# Altium PCB retroBreadboard_v2i1.PcbDoc
Units mm, origin at the board's own origin, x right, y up, seen from the top; angles counter-clockwise.
Board outline 55.88 x 96.52 mm, 4 copper layers (Top Layer, Int1 (GND), Int2 (PWR), Bottom Layer), stack 1.369 mm thick; 81 components, 76 nets, 317 pads, 92 vias.
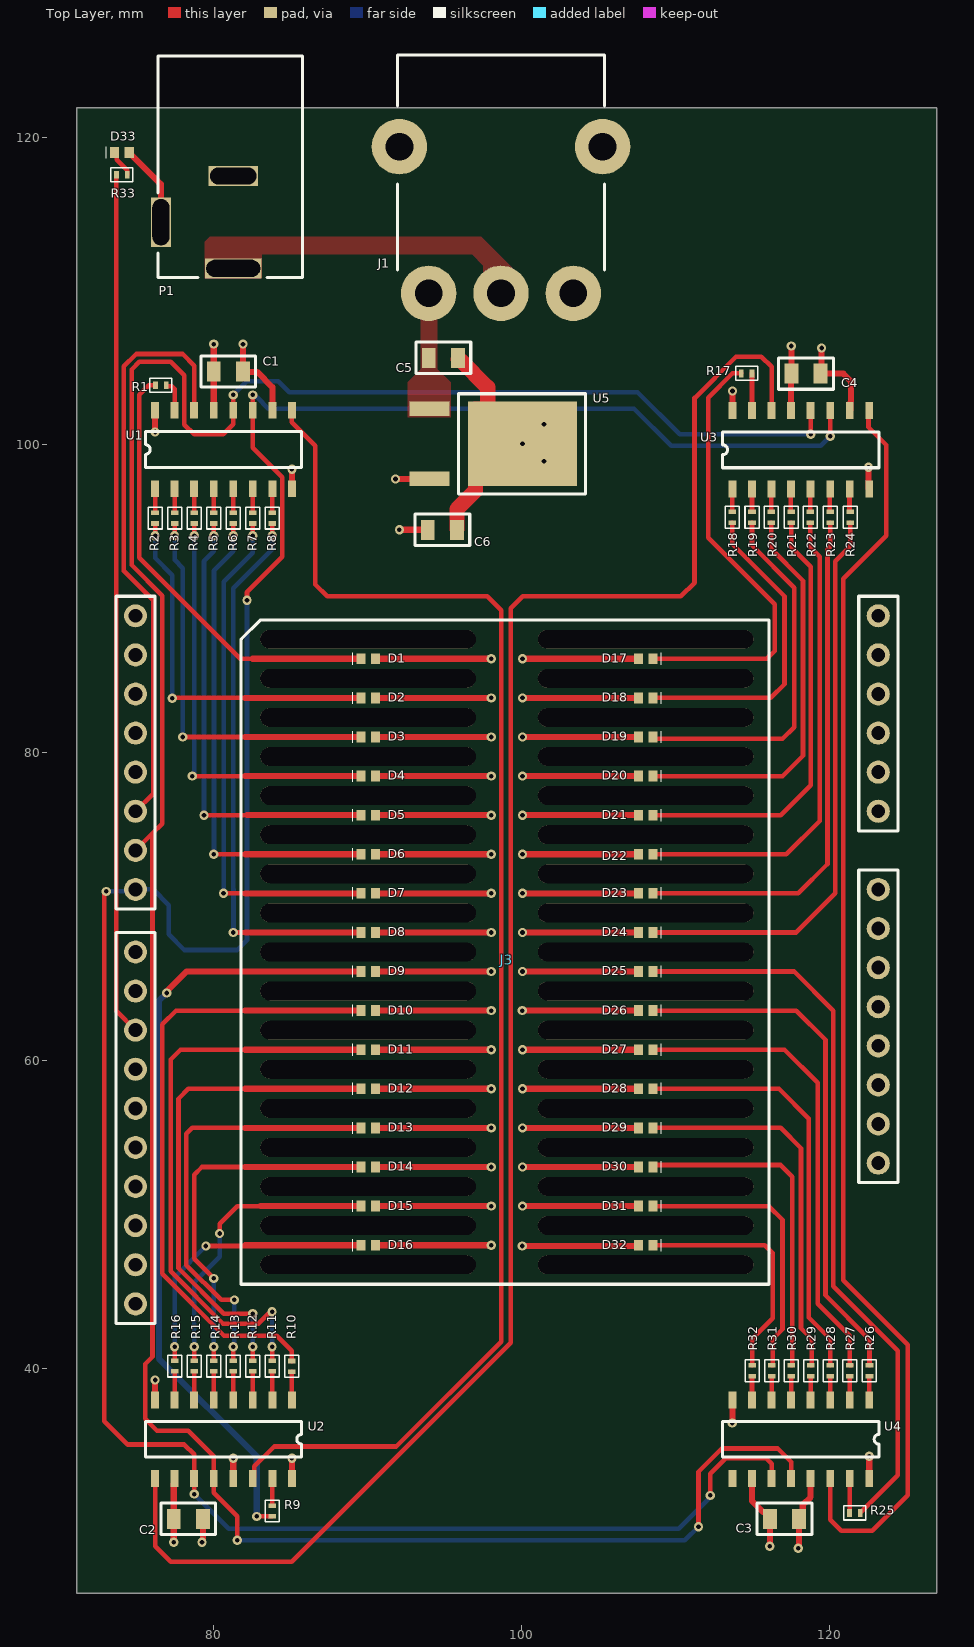
[diagram p0: Top Layer view]
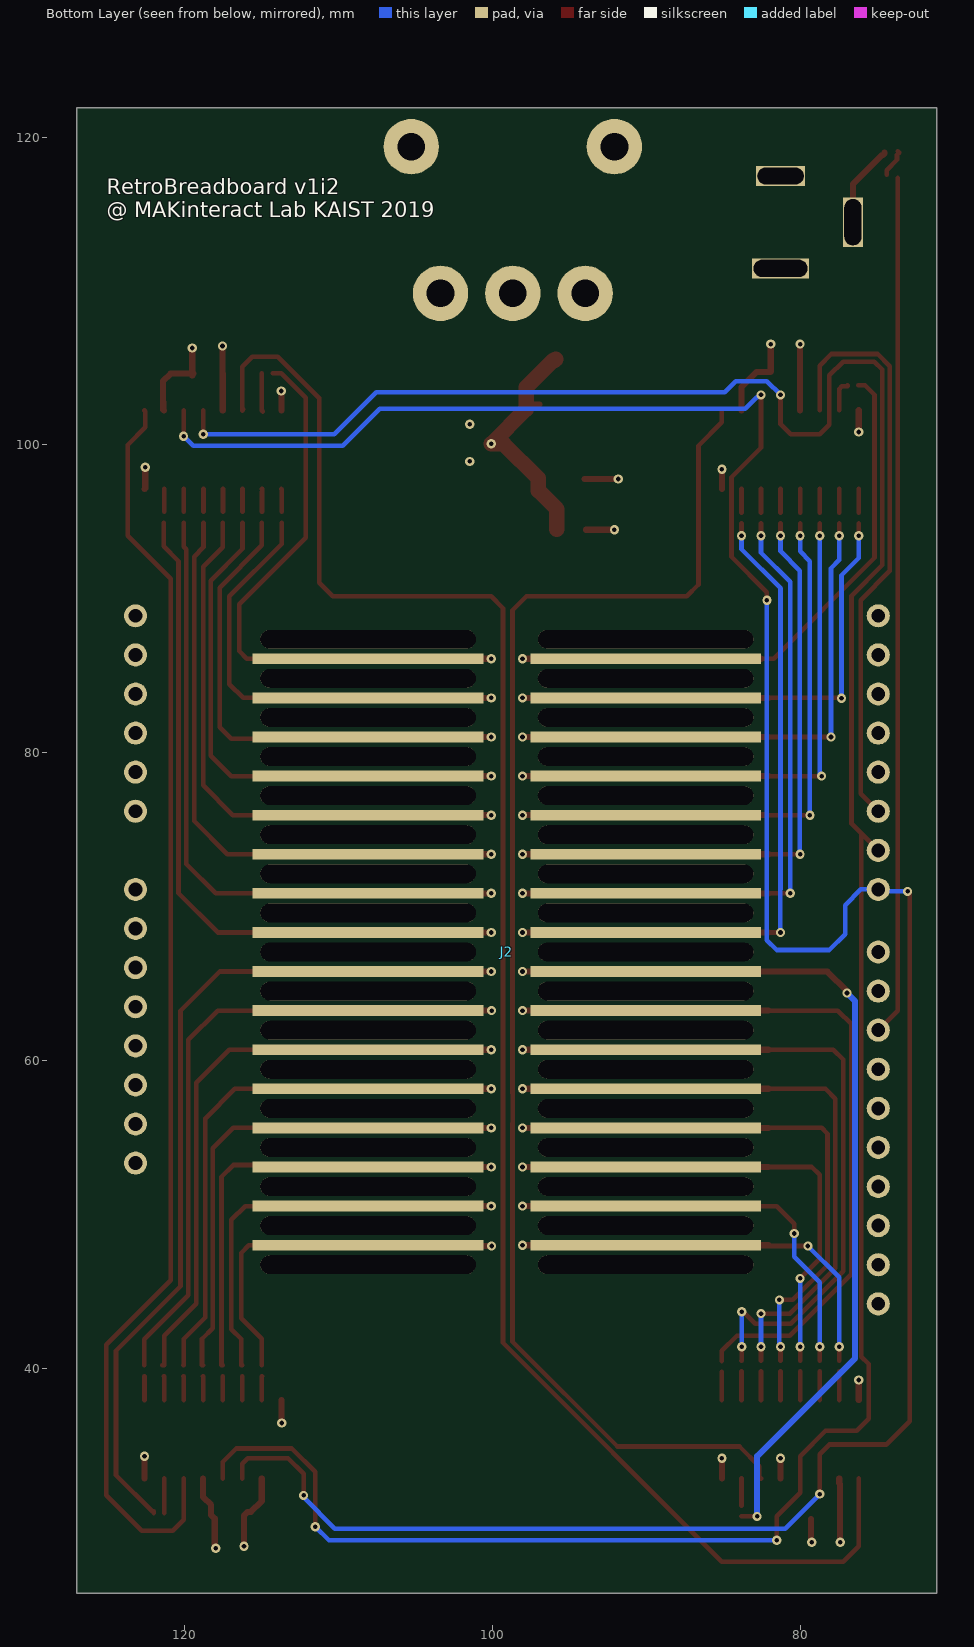
[diagram p1: Bottom Layer view, seen from below]
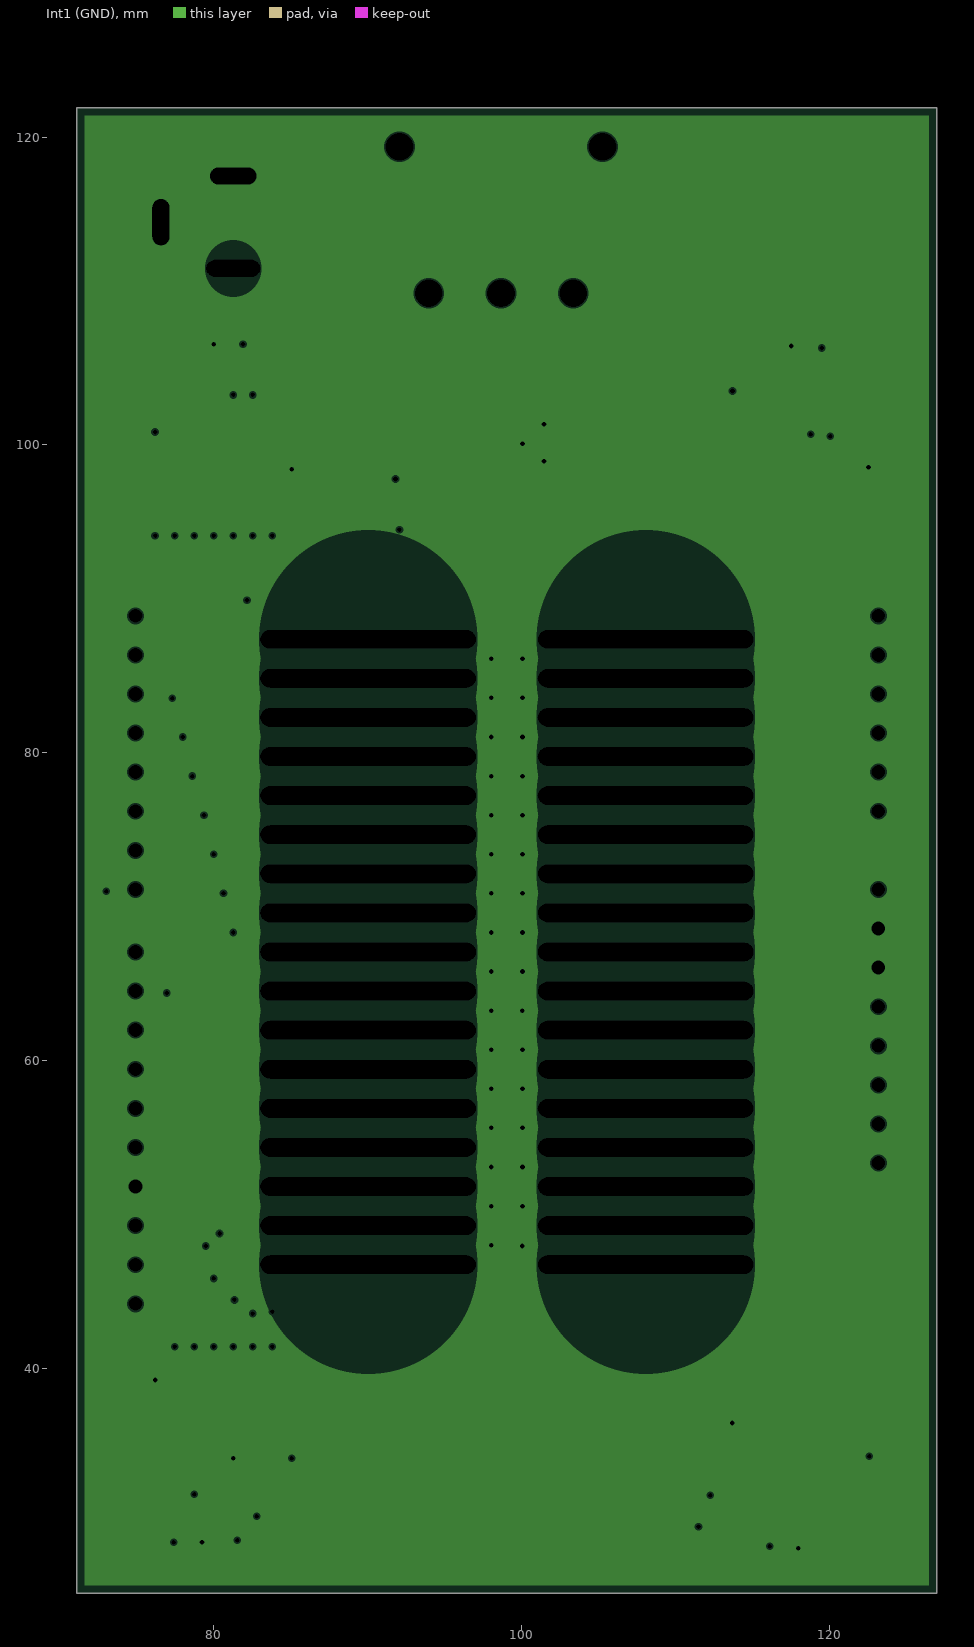
[diagram p2: Int1 (GND), clearances drawn from the general rule]
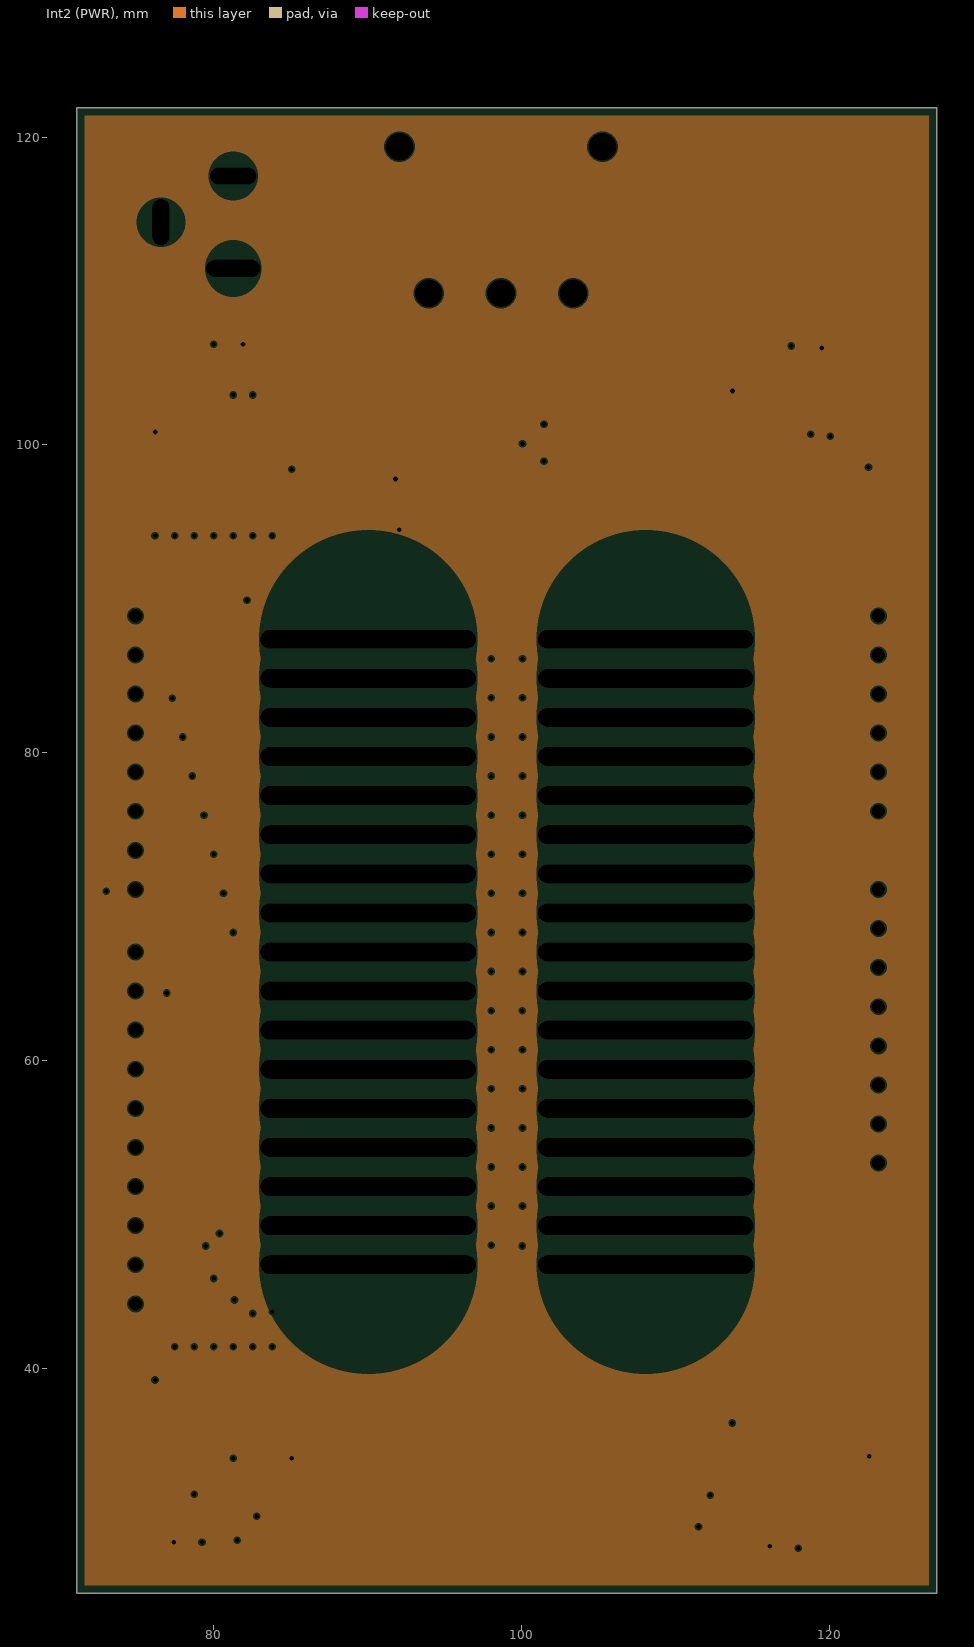
[diagram p3: Int2 (PWR), clearances drawn from the general rule]
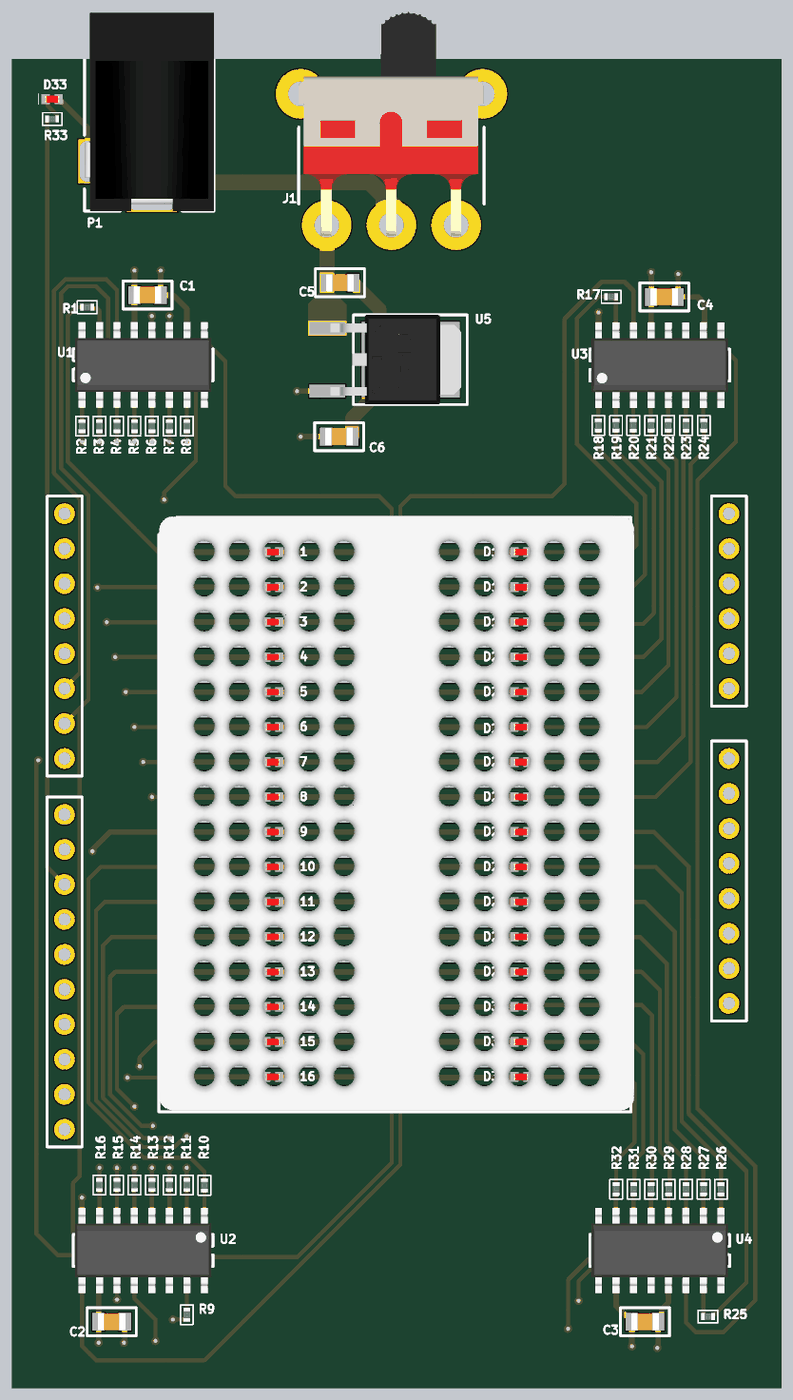
[diagram p4: 3D render of the assembled board from above, using the file's embedded part models]

## Layer stack, top to bottom
Top Solder: solder mask 0.0254, SM-001, Dk 4
Top Layer: signal copper 0.035
Dielectric 1: prepreg 0.1295, PP-017, Dk 4.3
Dielectric 2: prepreg 0.1295, PP-017, Dk 4.3
Int1 (GND): plane copper 0.035, net GND
Dielectric 3: core 0.7112, Core-039, Dk 4.8
Int2 (PWR): plane copper 0.035, net +5
Dielectric 4: prepreg 0.1295, PP-017, Dk 4.3
Dielectric 5: prepreg 0.1295, PP-017, Dk 4.3
Bottom Layer: signal copper 0.035
Bottom Solder: solder mask 0.0254, SM-001, Dk 4

## Board outline
71.12,25.4 127,25.4 127,121.92 71.12,121.92

## Design rules (kind name [scope] priority, off if disabled: settings)
Clearance "Around polygon" [IsRegion] p1: gap=0.3 ignorepadtopadclearanceinfootprint=FALSE
Clearance [All] p2: gap=0.2 ignorepadtopadclearanceinfootprint=FALSE
ComponentClearance ComponentClearance_breadboard [InComponent('J3') vs InComponentClass('Top Side Components')] p1: gap=0 collisioncheckmode=3 verticalgap=0 showdistances=FALSE
ComponentClearance [All] p2: gap=0.2 collisioncheckmode=3 verticalgap=0.2 showdistances=FALSE
HoleSize [All] p1: absolutevalues=TRUE maxlimit=14 minlimit=0.2 maxpercent=80.000 minpercent=20.000
HoleToHoleClearance [All] p1: gap=0.305 allowstackedmicrovias=TRUE
MinimumSolderMaskSliver [All] p1: minsoldermaskwidth=0.02
PlaneClearance [All] p1: clearance=0.1
PlaneConnect [All] p1: planeconnectstyle=Direct reliefexpansion=0.508 reliefentries=4 reliefconductorwidth=0.254 reliefairgap=0.254
PolygonConnect [All] p1: connectstyle=Direct reliefconductorwidth=0.254 reliefentries=4 polygonreliefangle="90 Angle" airgapwidth=0.254
RoutingVias [All] p1: holewidth=0.3 width=0.6 viastyle="Through Hole" minholewidth=0.3 minwidth=0.6 maxholewidth=0.3 maxwidth=0.6
SilkToSilkClearance [All] p1: silktosilkclearance=0.1
SilkToSolderMaskClearance [IsPad] p1: minsilkscreentomaskgap=0.1 clearancetoexposedcopper=TRUE
SolderMaskExpansion [All] p1: expansion=0.1
Width Width_POWER [InNet ('+*') or InNet('GND')] p1: maxlimit=3 minlimit=0.4 preferedwidth=0.4
Width [All] p2: maxlimit=0.5 minlimit=0.3 preferedwidth=0.4
22 further rules are at their usual default settings.

## Components (designator, comment, footprint, x,y, rotation, side; value= is the part's Value field where it differs from the comment)
C1 "10u" C0805 80.96,104.775 r0 top
C2 "10u" C0805 78.359,30.226 r180 top
C3 "10u" C0805 117.094,30.226 r180 top
C4 "10u" C0805 118.491,104.638 r0 top
C5 "330n" C0805 94.935,105.664 r180 top
C6 "100n" C0805 94.869,94.488 r180 top
D1 "VLMB1500-GS08" VLMB1500-GS08 90.051,86.106 r0 top
D2 "VLMB1500-GS08" VLMB1500-GS08 90.051,83.566 r0 top
D3 "VLMB1500-GS08" VLMB1500-GS08 90.051,81.026 r0 top
D4 "VLMB1500-GS08" VLMB1500-GS08 90.051,78.486 r0 top
D5 "VLMB1500-GS08" VLMB1500-GS08 90.051,75.946 r0 top
D6 "VLMB1500-GS08" VLMB1500-GS08 90.051,73.406 r0 top
D7 "VLMB1500-GS08" VLMB1500-GS08 90.051,70.866 r0 top
D8 "VLMB1500-GS08" VLMB1500-GS08 90.051,68.326 r0 top
D9 "VLMB1500-GS08" VLMB1500-GS08 90.051,65.786 r0 top
D10 "VLMB1500-GS08" VLMB1500-GS08 90.051,63.246 r0 top
D11 "VLMB1500-GS08" VLMB1500-GS08 90.051,60.706 r0 top
D12 "VLMB1500-GS08" VLMB1500-GS08 90.051,58.166 r0 top
D13 "VLMB1500-GS08" VLMB1500-GS08 90.051,55.626 r0 top
D14 "VLMB1500-GS08" VLMB1500-GS08 90.051,53.086 r0 top
D15 "VLMB1500-GS08" VLMB1500-GS08 90.051,50.546 r0 top
D16 "VLMB1500-GS08" VLMB1500-GS08 90.051,48.006 r0 top
D17 "VLMB1500-GS08" VLMB1500-GS08 108.085,86.106 r180 top
D18 "VLMB1500-GS08" VLMB1500-GS08 108.085,83.566 r180 top
D19 "VLMB1500-GS08" VLMB1500-GS08 108.085,81.026 r180 top
D20 "VLMB1500-GS08" VLMB1500-GS08 108.085,78.486 r180 top
D21 "VLMB1500-GS08" VLMB1500-GS08 108.085,75.946 r180 top
D22 "VLMB1500-GS08" VLMB1500-GS08 108.085,73.406 r180 top
D23 "VLMB1500-GS08" VLMB1500-GS08 108.085,70.866 r180 top
D24 "VLMB1500-GS08" VLMB1500-GS08 108.085,68.326 r180 top
D25 "VLMB1500-GS08" VLMB1500-GS08 108.085,65.786 r180 top
D26 "VLMB1500-GS08" VLMB1500-GS08 108.085,63.246 r180 top
D27 "VLMB1500-GS08" VLMB1500-GS08 108.085,60.706 r180 top
D28 "VLMB1500-GS08" VLMB1500-GS08 108.085,58.166 r180 top
D29 "VLMB1500-GS08" VLMB1500-GS08 108.085,55.626 r180 top
D30 "VLMB1500-GS08" VLMB1500-GS08 108.085,53.086 r180 top
D31 "VLMB1500-GS08" VLMB1500-GS08 108.085,50.546 r180 top
D32 "VLMB1500-GS08" VLMB1500-GS08 108.085,48.006 r180 top
D33 "VLMB1500-GS08" VLMB1500-GS08 74.041,118.999 r0 top
J1 "500SSP1S1M6QEA" "SLIDE SPDT" 93.975,109.85 r0 top locked
J2 "MiniBreadbaord" "MINI_BREADBOARD HOLE" 99.06,67.056 r0 top locked
J3 "UNO_SHEILD" ARDUINO_UNO_SHIELD 74.93,88.9 r90 top locked
P1 "PJ-002A" PJ-002A 81.28,111.475 r90 top
R1 "RC0402FR-07200RL" RES0402 76.58,103.886 r180 top
R2 "RC0402FR-07200RL" RES0402 76.2,95.25 r270 top
R3 "RC0402FR-07200RL" RES0402 77.47,95.25 r270 top
R4 "RC0402FR-07200RL" RES0402 78.74,95.25 r270 top
R5 "RC0402FR-07200RL" RES0402 80.01,95.25 r270 top
R6 "RC0402FR-07200RL" RES0402 81.28,95.25 r270 top
R7 "RC0402FR-07200RL" RES0402 82.55,95.25 r270 top
R8 "RC0402FR-07200RL" RES0402 83.82,95.25 r270 top
R9 "RC0402FR-07200RL" RES0402 83.82,30.734 r270 top
R10 "RC0402FR-07200RL" RES0402 85.09,40.132 r90 top
R11 "RC0402FR-07200RL" RES0402 83.82,40.154 r90 top
R12 "RC0402FR-07200RL" RES0402 82.55,40.154 r90 top
R13 "RC0402FR-07200RL" RES0402 81.28,40.154 r90 top
R14 "RC0402FR-07200RL" RES0402 80.01,40.154 r90 top
R15 "RC0402FR-07200RL" RES0402 78.74,40.154 r90 top
R16 "RC0402FR-07200RL" RES0402 77.47,40.154 r90 top
R17 "RC0402FR-07200RL" RES0402 114.636,104.648 r180 top
R18 "RC0402FR-07200RL" RES0402 113.697,95.305 r270 top
R19 "RC0402FR-07200RL" RES0402 114.986,95.305 r270 top
R20 "RC0402FR-07200RL" RES0402 116.237,95.305 r270 top
R21 "RC0402FR-07200RL" RES0402 117.526,95.305 r270 top
R22 "RC0402FR-07200RL" RES0402 118.777,95.305 r270 top
R23 "RC0402FR-07200RL" RES0402 120.066,95.305 r270 top
R24 "RC0402FR-07200RL" RES0402 121.368,95.305 r270 top
R25 "RC0402FR-07200RL" RES0402 121.666,30.607 r0 top
R26 "RC0402FR-07200RL" RES0402 122.615,39.847 r90 top
R27 "RC0402FR-07200RL" RES0402 121.345,39.847 r90 top
R28 "RC0402FR-07200RL" RES0402 120.075,39.847 r90 top
R29 "RC0402FR-07200RL" RES0402 118.805,39.847 r90 top
R30 "RC0402FR-07200RL" RES0402 117.535,39.847 r90 top
R31 "RC0402FR-07200RL" RES0402 116.265,39.847 r90 top
R32 "RC0402FR-07200RL" RES0402 114.995,39.847 r90 top
R33 "RC0402FR-07200RL" RES0402 74.041,117.555 r0 top
U1 "SN74HC595DR" SOIC16 76.2,97.155 r90 top
U2 "SN74HC595DR" SOIC16 85.09,37.948 r270 top
U3 "SN74HC595DR" SOIC16 113.716,97.135 r90 top
U4 "SN74HC595DR" SOIC16 122.606,37.948 r270 top
U5 "L7805CDT-TR" DPAK 98.171,100.076 r0 top

## Footprints (in the part's own frame and the unit in brackets; to place one, negate y for a bottom-side part, rotate by r counter-clockwise, add the part's x,y. Pads: shape width x height; smd on the part's side, far side on the other; paste and mask are expansions set on the pad)
ARDUINO_UNO_SHIELD [mm]
  round 1.5 hole 0.9: 1(0,0) 2(-2.54,0) 3(-5.08,0) 4(-7.62,0) 5(-10.16,0) 6(-12.7,0) 7(-15.24,0) 8(-17.78,0) 9(-21.844,0) 10(-24.384,0) 11(-26.924,0) 12(-29.464,0) 13(-32.004,0) 14(-34.544,0) 15(-37.084,0) 16(-39.624,0) 17(0,-48.26) 18(-2.54,-48.26) 19(-5.08,-48.26) 20(-7.62,-48.26) 21(-10.16,-48.26) 22(-12.7,-48.26) 23(-17.78,-48.26) 24(-20.32,-48.26) 25(-22.86,-48.26) 26(-25.4,-48.26) 27(-27.94,-48.26) 28(-30.48,-48.26) 29(-33.02,-48.26) ""(-44.704,0) ""(-42.164,0) ""(-35.56,-48.26)
  silkscreen extent -45.97,-49.53 1.27,1.27
C0805 [mm]
  rect 0.9x1.3 smd: 1(-0.95,0) 2(0.95,0)
  silkscreen extent -1.78,-1.02 1.78,1.02, body extent -1,-0.62 1,0.62, height 0.81
DPAK [mm] "D-PAK, 3-Pads, Body 6.10x6.56mm (max), IPC Medium Density"
  rect 2.6x0.95 smd: 1(-4.15,2.28) 3(-4.15,-2.28)
  rect 7.1x5.5 smd: 4(1.9,0)
  silkscreen extent -2.25,-3.25 6,3.25, body extent -3.94,-3.24 5.56,3.25, height 2.31
"MINI_BREADBOARD HOLE" [mm]
  rect 15x0.7 smd far side mask+0.05: 1(-9.017,19.05) 2(-9.017,16.51) 3(-9.017,13.97) 4(-9.017,11.43) 5(-9.017,8.89) 6(-9.017,6.35) 7(-9.017,3.81) 8(-9.017,1.27) 9(-9.017,-1.27) 10(-9.017,-3.81) 11(-9.017,-6.35) 12(-9.017,-8.89) 13(-9.017,-11.43) 14(-9.017,-13.97) 15(-9.017,-16.51) 16(-9.017,-19.05) 17(9.017,19.05) 18(9.017,16.51) 19(9.017,13.97) 20(9.017,11.43) 21(9.017,8.89) 22(9.017,6.35) 23(9.017,3.81) 24(9.017,1.27) 25(9.017,-1.27) 26(9.017,-3.81) 27(9.017,-6.35) 28(9.017,-8.89) 29(9.017,-11.43) 30(9.017,-13.97) 31(9.017,-16.51) 32(9.017,-19.05)
  rrect100% 14x1.2 hole 1.2 slot 14 at 0 deg unplated: ""(-9.017,-20.32) ""(-9.017,-17.78) ""(-9.017,-15.24) ""(-9.017,-12.7) ""(-9.017,-10.16) ""(-9.017,-7.62) ""(-9.017,-5.08) ""(-9.017,-2.54) ""(-9.017,0) ""(-9.017,2.54) ""(-9.017,5.08) ""(-9.017,7.62) ""(-9.017,10.16) ""(-9.017,12.7) ""(-9.017,15.24) ""(-9.017,17.78) ""(-9.017,20.32) ""(9.017,-20.32) ""(9.017,-17.78) ""(9.017,-15.24) ""(9.017,-12.7) ""(9.017,-10.16) ""(9.017,-7.62) ""(9.017,-5.08) ""(9.017,-2.54) ""(9.017,0) ""(9.017,2.54) ""(9.017,5.08) ""(9.017,7.62) ""(9.017,10.16) ""(9.017,12.7) ""(9.017,15.24) ""(9.017,17.78) ""(9.017,20.32)
  silkscreen extent -17.27,-21.59 17.02,21.56, body extent -17.25,-21.48 43.31,21.64, height 22.75
PJ-002A [mm] "CONN PWR JACK 2X5.5MM SOLDER"
  rect 1.3x3.7 hole 1.1 slot 3.5 at 90 deg: 1(0,0)
  rect 1.3x3.2 hole 1.1 slot 3 at 90 deg: 2(6,0)
  rect 3.2x1.3 hole 1.1 slot 3 at 0 deg: 3(3,4.7)
  silkscreen extent -0.6,-4.5 13.8,4.9, body extent -0.6,-4.5 13.8,4.9, height 11.05
RES0402 [mm]
  rect 0.3x0.5 smd mask+0.02: 1(-0.35,0) 2(0.35,0)
  silkscreen extent -0.71,-0.46 0.71,0.46, body extent -0.5,-0.25 0.5,0.25, height 0.25
"SLIDE SPDT" [mm] "500SSP1S1M6QEA"
  round 3.6 hole 1.8: 1(0,0) 2(4.7,0) 3(9.4,0) ""(-1.9,9.53) ""(11.3,9.53)
  silkscreen extent -2.03,1.52 11.43,15.49, body extent -2.03,-0.75 11.38,15.49, height 6.6
SOIC16 [mm]
  rect 1.1x0.51 smd mask+0.02: 1(0,0) 2(0,-1.27) 3(0,-2.54) 4(0,-3.81) 5(0,-5.08) 6(0,-6.35) 7(0,-7.62) 8(0,-8.89) 9(5.1,-8.89) 10(5.1,-7.62) 11(5.1,-6.35) 12(5.1,-5.08) 13(5.1,-3.81) 14(5.1,-2.54) 15(5.1,-1.27) 16(5.1,0)
  silkscreen extent 1.38,-9.53 3.72,0.64, body extent -0.56,-9.4 5.64,0.51, height 1.71
VLMB1500-GS08 [mm]
  rect 0.6x0.7 smd mask+0.02: 1(-0.475,0) 2(0.475,0)
  silkscreen extent -1.02,-0.38 -1.02,0.38, body extent -0.5,-0.25 0.51,0.25, height 0.45

## Part data
C1 C2 C3 C4: library part C0805_10u, Capacitance=10uF, Case/Package=0805, Case Code (Metric)=2012, Dielectric=X5R, Manufacturer=Samsung, Manufacturer Part Number=CL21A106KQFNNNG, Max Operating Temperature=85°C, Min Operating Temperature=-55°C, Package Quantity=3000, Supplier Part Number 1=1276-6457-1-ND, Tolerance=10%, Voltage=6.3V, Case Code (Imperial)=0805, ComponentLink1Description=http://www.samsungsem.com/kr/support/product-search/mlcc/CL21A106KQFNNNG.jsp?src-supplier=Digi-Key, ComponentLink1URL=http://www.samsungsem.com/kr/support/product-search/mlcc/CL21A106KQFNNNG.jsp?src-supplier=Digi-Key, ComponentLink2Description=https://produktinfo.conrad.com/datenblaetter/450000-474999/454985-da-01-en-VS_KONDENSATOR_0805.pdf?src-supplier=Conrad, ComponentLink2URL=https://produktinfo.conrad.com/datenblaetter/450000-474999/454985-da-01-en-VS_KONDENSATOR_0805.pdf?src-supplier=Conrad, Depth=1.25mm, Height=1.25mm, Lead Free="Lead Free", Length=2mm, Material=Ceramic, Mount="Surface Mount", Packaging="Tape and Reel", Pricing 1="1 = 0.13000, 10 = 0.09600, 100 = 0.04270, 500 = 0.03054, 1000 = 0.02399 (USD)", RoHS=Yes, Stock 1=53378, Supplier 1=Digi-Key, Thickness=0.053inch, Voltage Rating=6.3V, Width=0.049inch
C5: library part C0805_330n, Capacitance=330nF, Case/Package=0805, Case Code (Metric)=2012, Dielectric=X7R, Manufacturer=Samsung, Manufacturer Part Number=CL21B334KAFNNNG, Max Operating Temperature=125°C, Min Operating Temperature=-55°C, Package Quantity=3000, Supplier Part Number 1=1276-6479-1-ND, Tolerance=10%, Voltage=25V, Case Code (Imperial)=0805, ComponentLink1Description=https://www.distrelec.biz/Web/Downloads/_e/ng/MLCC_CatalogDownload2013_ENG.pdf?mime=application%2Fpdf&src-supplier=Distrelec, ComponentLink1URL=https://www.distrelec.biz/Web/Downloads/_e/ng/MLCC_CatalogDownload2013_ENG.pdf?mime=application%2Fpdf&src-supplier=Distrelec, ComponentLink2Description=http://www.samsungsem.com/global/support/library/product-catalog/__icsFiles/afieldfile/2014/11/13/MLCC.pdf?src-supplier=Digi-Key, ComponentLink2URL=http://www.samsungsem.com/global/support/library/product-catalog/__icsFiles/afieldfile/2014/11/13/MLCC.pdf?src-supplier=Digi-Key, ComponentLink3Description=http://www1.futureelectronics.com/doc/SAMSUNG%20PASSIVE/CL05B104KQ5NNNC.pdf?src-supplier=Future+Electronics, ComponentLink3URL=http://www1.futureelectronics.com/doc/SAMSUNG%20PASSIVE/CL05B104KQ5NNNC.pdf?src-supplier=Future+Electronics, Depth=1.25mm, Height=1.25mm, Lead Free="Lead Free", Length=2mm, Material=Ceramic, Mount="Surface Mount", Packaging="Tape and Reel", Pricing 1="1 = 0.12000, 10 = 0.08600, 100 = 0.03810, 500 = 0.02722, 1000 = 0.02138 (USD)", RoHS=Yes, Stock 1=834, Supplier 1=Digi-Key, Thickness=0.053inch, Voltage Rating=25V, Width=0.049inch
C6: library part C0805_100n, Capacitance=100nF, Case/Package=0805, Case Code (Metric)=2012, Dielectric=Y5V, Manufacturer=Samsung, Manufacturer Part Number=CL21F104ZBCNNNC, Max Operating Temperature=85°C, Min Operating Temperature=-30°C, Package Quantity=1, Supplier Part Number 1=1276-1007-1-ND, Tolerance=80%, Voltage Rating=50V, Case Code (Imperial)=0805, ComponentLink1Description=https://www.verical.com/server-webapp/html/getDatasheet?partID=466953&src-supplier=Verical, ComponentLink1URL=https://www.verical.com/server-webapp/html/getDatasheet?partID=466953&src-supplier=Verical, ComponentLink2Description=https://produktinfo.conrad.com/datenblaetter/450000-474999/454191-da-01-en-VS_KONDENSATOR_0805.pdf?src-supplier=Conrad, ComponentLink2URL=https://produktinfo.conrad.com/datenblaetter/450000-474999/454191-da-01-en-VS_KONDENSATOR_0805.pdf?src-supplier=Conrad, Depth=1.25mm, Height=0.85mm, Length=2mm, Material=Ceramic, Mount="Surface Mount", Packaging="Tape and Reel", Pricing 1="1 = 0.10000, 10 = 0.04400, 100 = 0.01950, 500 = 0.01390, 1000 = 0.01092 (USD)", Radiation Hardening=No, RoHS=Yes, Stock 1=117334, Supplier 1=Digi-Key, Thickness=0.037inch, Width=0.049inch
D1 D2 D3 D4 D5 D6 D7 D8 D9 D10 D11 D12 D13 D14 D15 D16 D17 D18 D19 D20 D21 D22 D23 D24 D25 D26 D27 D28 D29 D30 D31 D32 D33: "Standard LEDs - SMD 0402 BLUE Non-Diff", Case/Package=0402, Case Code (Metric)=1005, Colour=Blue, Forward Current=30mA, Forward Voltage=3.15V, Lens Colour=Clear, Manufacturer=Vishay, Max Operating Temperature=80°C, Max Power Dissipation=76mW, Min Operating Temperature=-30°C, Package Quantity=1, Power Rating=75mW, Supplier Part Number 1=VLMB1500-GS08DKR-ND, Test Current=5mA, Case Code (Imperial)=0402, ComponentLink1Description=http://www.vishay.com/docs/82554/vlmo1500.pdf, ComponentLink1URL=http://www.vishay.com/docs/82554/vlmo1500.pdf, Contact Plating=Matte,Tin, Depth=0.5mm, Dominant Wavelength=470nm, Height=0.35mm, Illumination Colour=Blue, Lead Free="Lead Free", Length=1mm, Lens Style=Rectangular, Luminous Intensity=45mcd, Manufacturer Part Number=VLMB1500-GS08, Mount="Surface Mount", Number of Elements=1, Number of LEDs=1, Number of Pins=2, Packaging="Tape and Reel", Power Dissipation=76mW, Pricing 1="1=0.41, 10=0.292, 25=0.2532, 100=0.1949, 250=0.15836, 500=0.11696, 1000=0.09746 (USD)", Radiation Hardening=No, REACH SVHC=Unknown, Stock 1=322508, Supplier 1=Digi-Key, Viewing Angle=130°, Width=0.5mm
J1: library part "SLIDE SPDT", "SWITCH SLIDE SPDT 5A 120V", Contact Current Rating=5A, Contact Resistance=10mR, Flammability Rating="UL94 V-0", Manufacturer=E-Switch, Max Operating Temperature=85°C, Max Voltage Rating (AC)=250V, Max Voltage Rating (DC)=28V, Min Operating Temperature=-30°C, Package Quantity=1, Supplier Part Number 1=EG2478-ND, Voltage Rating (AC)=120V, Actuator Length=4.72mm, Actuator Material=Nylon,Polyamide, ComponentLink1Description=https://datasheet.ciiva.com/16337/500-16337624.pdf, ComponentLink1URL=https://datasheet.ciiva.com/16337/500-16337624.pdf, ComponentLink2Description=https://datasheet.ciiva.com/16174/35500-16174234.pdf, ComponentLink2URL=https://datasheet.ciiva.com/16174/35500-16174234.pdf, ComponentLink3Description=https://datasheet.ciiva.com/2889/t511006d-2889419.pdf, ComponentLink3URL=https://datasheet.ciiva.com/2889/t511006d-2889419.pdf, Contact Material="Copper,Silver,Copper Alloy", Contact Plating=Silver, Current Rating=5A, Electrical Life=30000Cycles, Housing Material="Stainless Steel", Lead Free="Lead Free", Manufacturer Part Number=500SSP1S1M6QEA, Mechanical Life=30000Cycles, Mount="Through Hole,Brackets", Orientation="Right Angle", Packaging=Bulk, Pricing 1="1=2.93, 10=2.808, 25=2.7484, 50=2.39, 100=2.3303, 250=2.27052, 500=1.912, 1000=1.7925, 5000=1.64313 (USD)", REACH SVHC=Unknown, Stock 1=6111, Supplier 1=Digi-Key, Switch Function=On-On, Switch Travel=2.16mm, Termination="PC Pin", Throw Configuration=SPDT, Voltage Rating (DC)=28V
J2: library part MINI_BREADBOARD, "Mini Breadboard", Colour=Natural, Manufacturer="TE Connectivity AMP", Manufacturer Part Number=1738132-1, Supplier Part Number 1=1738132-1-ND, ComponentLink1Description=http://www.te.com/commerce/DocumentDelivery/DDEController?Action=srchrtrv&DocNm=1738132&DocType=Customer+Drawing&DocLang=English, ComponentLink1URL=http://www.te.com/commerce/DocumentDelivery/DDEController?Action=srchrtrv&DocNm=1738132&DocType=Customer+Drawing&DocLang=English, Gender=Male, Stock 1=0, Supplier 1=Digi-Key
J3: library part ARDUINO_UNO_SHIELD
P1: "PJ-002 Series 2 x 6.5 mm 16 V Right Angle Through Hole Power Jack", Colour=Black, Current Rating=2.5A, Flammability Rating="UL94 V-0", Insulation Resistance=50MR, Manufacturer=CUI, Max Operating Temperature=85°C, Min Operating Temperature=-25°C, Package Quantity=500, Supplier Part Number 1=CP-002A-ND, Voltage Rating=24V, ComponentLink1Description=http://www.cui.com/product/resource/digikeypdf/pj-002a.pdf, ComponentLink1URL=http://www.cui.com/product/resource/digikeypdf/pj-002a.pdf, ComponentLink2Description=http://www.cui.com/Product/Resource/FuturePDF/PJ-002A.pdf, ComponentLink2URL=http://www.cui.com/Product/Resource/FuturePDF/PJ-002A.pdf, ComponentLink3Description=http://www.mouser.com/ds/2/670/pj-002a-515880.pdf, ComponentLink3URL=http://www.mouser.com/ds/2/670/pj-002a-515880.pdf, Connector Type=Jack, Contact Gender=Male, Contact Material="Copper,Copper Alloy", Contact Plating=Nickel,Tin, Diameter=2.1mm, Gender=Male, Housing Colour=Black, Housing Material=Thermoplastic, Lead Free="Lead Free", Manufacturer Part Number=PJ-002A, Mount="Through Hole", Number of Conductors=2, Orientation=Horizontal, Packaging=Bulk, Shielding=Unshielded, Stock 1=133077, Supplier 1=Digi-Key, Termination="Through Hole"
R1 R2 R3 R4 R5 R6 R7 R8 R9 R10 R11 R12 R13 R14 R15 R16 R17 R18 R19 R20 R21 R22 R23 R24 R25 R26 R27 R28 R29 R30 R31 R32 R33: library part R0402_200, "RES SMD 200 OHM 1% 1/16W 0402", Case/Package=0402, Case Code (Metric)=1005, Manufacturer=Yageo, Max Operating Temperature=155°C, Max Power Dissipation=63mW, Min Operating Temperature=-55°C, Package Quantity=1, Resistance=200R, Supplier Part Number 1=311-200LRCT-ND, Temperature Coefficient=100ppm/°C, Tolerance=1%, Voltage Rating=50V, Case Code (Imperial)=0402, ComponentLink1Description=http://www.yageo.com/documents/recent/PYu-RC_Group_51_RoHS_L_10.pdf?src-supplier=Digi-Key, ComponentLink1URL=http://www.yageo.com/documents/recent/PYu-RC_Group_51_RoHS_L_10.pdf?src-supplier=Digi-Key, ComponentLink2Description=http://www.farnell.com/datasheets/1018594.pdf?src-supplier=Element14, ComponentLink2URL=http://www.farnell.com/datasheets/1018594.pdf?src-supplier=Element14, ComponentLink3Description=http://www.yageo.com/documents/recent/PYu-RC0402_51_RoHS_L_6_r.pdf?src-supplier=Future+Electronics, ComponentLink3URL=http://www.yageo.com/documents/recent/PYu-RC0402_51_RoHS_L_6_r.pdf?src-supplier=Future+Electronics, ComponentLink4Description=https://www.verical.com/server-webapp/html/getDatasheet?partID=331152&src-supplier=Verical, ComponentLink4URL=https://www.verical.com/server-webapp/html/getDatasheet?partID=331152&src-supplier=Verical, ComponentLink5Description=http://www.farnell.com/datasheets/2167052.pdf?src-supplier=Element14, ComponentLink5URL=http://www.farnell.com/datasheets/2167052.pdf?src-supplier=Element14, ComponentLink6Description=http://www.yageo.com/documents/recent/PYu-RC0402_51_RoHS_L_6_r.pdf?src-supplier=Mouser, ComponentLink6URL=http://www.yageo.com/documents/recent/PYu-RC0402_51_RoHS_L_6_r.pdf?src-supplier=Mouser, Composition="Thick Film", Depth=0.5mm, Features="Moisture Resistant", Height=0.016inch, Lead Free="Lead Free", Length=1mm, Manufacturer Part Number=RC0402FR-07200RL, Military Standard=Not, Number of Terminations=2, Packaging="Tape and Reel", Power Rating=63mW, Pricing 1="1 = 0.10000, 10 = 0.01600, 100 = 0.00670, 1000 = 0.00301, 2500 = 0.00261, 5000 = 0.00215 (USD)", REACH SVHC="No SVHC", RoHS=Yes, Stock 1=7546584, Supplier 1=Digi-Key, Termination=SMD/SMT, Voltage Rating (DC)=50V, Width=0.02inch
U1 U2 U3 U4: library part 74HC595, "IC, SM, LOGIC, 74HC, REGISTER", Case/Package=SOIC, Frequency=42MHz, Manufacturer="Texas Instruments", Max Input Current=1uA, Max Operating Temperature=85°C, Max Supply Voltage=6V, Min Operating Temperature=-40°C, Min Supply Voltage=2V, Operating Supply Voltage=5V, Package Quantity=2500, Quiescent Current=8uA, Supplier Part Number 1=296-14857-6-ND, ComponentLink1Description=http://www.ti.com/lit/ds/symlink/sn74hc595.pdf, ComponentLink1URL=http://www.ti.com/lit/ds/symlink/sn74hc595.pdf, ComponentLink2Description=http://www.farnell.com/datasheets/1831198.pdf, ComponentLink2URL=http://www.farnell.com/datasheets/1831198.pdf, ComponentLink3Description=http://www.farnell.com/datasheets/1886142.pdf, ComponentLink3URL=http://www.farnell.com/datasheets/1886142.pdf, ComponentLink4Description=https://www.verical.com/server-webapp/html/getDatasheet?partID=134875, ComponentLink4URL=https://www.verical.com/server-webapp/html/getDatasheet?partID=134875, ComponentLink5Description=http://www.farnell.com/datasheets/1905810.pdf, ComponentLink5URL=http://www.farnell.com/datasheets/1905810.pdf, ComponentLink6Description=http://www.ti.com/general/docs/lit/getliterature.tsp?genericPartNumber=SN54HC595-SP&&fileType=pdf, ComponentLink6URL=http://www.ti.com/general/docs/lit/getliterature.tsp?genericPartNumber=SN54HC595-SP&&fileType=pdf, ComponentLink7Description=http://www.jameco.com/Jameco/Products/ProdDS/916385.pdf, ComponentLink7URL=http://www.jameco.com/Jameco/Products/ProdDS/916385.pdf, ComponentLink8Description=http://www.farnell.com/datasheets/2020588.pdf, ComponentLink8URL=http://www.farnell.com/datasheets/2020588.pdf, ComponentLink9Description=http://datasheet.iiic.cc/texas_instruments/SN74HC595DR.pdf, ComponentLink9URL=http://datasheet.iiic.cc/texas_instruments/SN74HC595DR.pdf, Contact Plating=Gold, Direction=Unidirectional, Height=1.58mm, Lead Free="Lead Free", Length=9.9mm, Logic Function="Shift Register", Manufacturer Part Number=SN74HC595DR, Mount="Surface Mount", Number of Bits=8, Number of Bits per Element=8, Number of Circuits=4, Number of Elements=1, Number of Output Lines=10, Number of Pins=16, Packaging="Tape and Reel", Pricing 1="1=0.51, 10=0.433, 100=0.323, 500=0.2538, 1000=0.19611 (USD)", Propagation Delay=250ns, Radiation Hardening=No, REACH SVHC="No SVHC", Stock 1=53061, Supplier 1=Digi-Key, Termination=SMD/SMT, Turn-On Delay Time=250ns, Weight=0.004998oz, Width=3.91mm
U5: "IC REG LDO 5V 1.5A DPAK", Case/Package=TO-252, Dropout Voltage=2V, Manufacturer=STMicroelectronics, Max Input Voltage=35V, Max Operating Temperature=125°C, Max Output Current=1.5A, Min Input Voltage=7V, Min Operating Temperature=0°C, Min Output Voltage=5V, Package Quantity=1, Power Supply Rejection Ratio (PSRR)=62dB, Quiescent Current=8mA, Supplier Part Number 1=497-7255-2-ND, ComponentLink1Description=https://datasheet.ciiva.com/2042/cd00000444-2042784.pdf, ComponentLink1URL=https://datasheet.ciiva.com/2042/cd00000444-2042784.pdf, ComponentLink2Description=https://datasheet.ciiva.com/2042/cd00000444-2042785.pdf, ComponentLink2URL=https://datasheet.ciiva.com/2042/cd00000444-2042785.pdf, ComponentLink3Description=https://datasheet.ciiva.com/16357/cd00000444-16357893.pdf, ComponentLink3URL=https://datasheet.ciiva.com/16357/cd00000444-16357893.pdf, ComponentLink4Description=https://datasheet.ciiva.com/4882/cd00000444-4882231.pdf, ComponentLink4URL=https://datasheet.ciiva.com/4882/cd00000444-4882231.pdf, ComponentLink5Description=https://datasheet.ciiva.com/17360/cd00000444-17360220.pdf, ComponentLink5URL=https://datasheet.ciiva.com/17360/cd00000444-17360220.pdf, ComponentLink6Description=https://datasheet.ciiva.com/2042/cd00000444-2042783.pdf, ComponentLink6URL=https://datasheet.ciiva.com/2042/cd00000444-2042783.pdf, ComponentLink7Description=https://datasheet.ciiva.com/26904/l7805cdt-tr-26904768.pdf, ComponentLink7URL=https://datasheet.ciiva.com/26904/l7805cdt-tr-26904768.pdf, Contact Plating=Tin,Matte, Height=2.4mm, Lead Free="Lead Free", Length=6.6mm, Manufacturer Part Number=L7805CDT-TR, Mount="Surface Mount", Number of Outputs=1, Number of Pins=3, Number of Regulators=1, Output Current=1.5A, Output Voltage=5V, Packaging="Tape and Reel", Polarity=Positive, Radiation Hardening=No, Stock 1=7500, Supplier 1=Digi-Key, Width=6.2mm

## Via types
v1: diameter 0.6, hole 0.3, Top Layer to Bottom Layer, tented both sides, 89 vias
v2: diameter 0.6/0.6 (per signal layer), hole 0.3, Top Layer to Bottom Layer, tented both sides, 3 vias

## Nets (pads, with @x,y where several pads share a name; then routed paths per layer and width w, separated by ;. In a path a pad name is that pad's centre, name@x,y a point inside that pad or via, vN(x,y) a via of type N, cw(c..) or ccw(c..) an arc to the next point about the centre after c; other vN are vias at no path point)
+5: C1.2 C2.2 C3.2 C4.2 C6.2 U1.10 U1.16 U2.10 U2.16 U3.10 U3.16 U4.10 U4.16 U5.3 | length 30.2
  Top Layer w0.4: v1(76.2,100.838) U1.16 ; v1(77.409,28.702) C2.2 77.409,32.492 77.47,32.553 U2.10 ; v1(81.915,106.553) 81.915,104.78 C1.2 81.935,104.75 82.829,104.75 83.82,103.759 U1.10 ; U2.16 v1(85.09,34.163) ; v1(91.821,97.79) 91.827,97.796 U5.3 ; v1(92.075,94.488) C6.2 ; U3.16 v1(113.716,103.505) ; U4.10 114.986,31.384 115.694,30.676 115.894,30.676 116.144,30.426 C3.2 v1(116.144,28.448) ; C4.2 120.914,104.638 121.412,104.14 121.412,102.819 121.391,102.798 121.391,102.29 U3.10 ; C4.2@119.507,104.511 v1(119.507,106.299) ; U4.16 v1(122.606,34.29)
DS: J3.6 U1.14 | length 38.3
  Top Layer w0.3: J3.6 76.073,77.343 76.073,89.916 74.175,91.814 74.175,105.108 74.977,105.91 77.986,105.91 78.74,105.156 U1.14
GND: C1.1 C2.1 C3.1 C4.1 C5.1 C6.1 D1.2 D2.2 D3.2 D4.2 D5.2 D6.2 D7.2 D8.2 D9.2 D10.2 D11.2 D12.2 D13.2 D14.2 D15.2 D16.2 D17.2 D18.2 D19.2 D20.2 D21.2 D22.2 D23.2 D24.2 D25.2 D26.2 D27.2 D28.2 D29.2 D30.2 D31.2 D32.2 D33.2 J3.15 J3.24 J3.25 P1.2 P1.3 U1.8 U1.13 U2.8 U2.13 U3.8 U3.13 U4.8 U4.13 U5.4 | length 284.1
  Top Layer w0.4: D33.2 74.516,118.949 74.616,118.849 74.666,118.849 76.58,116.935 P1.3 ; U2.8 v1(76.2,39.243) ; v1(79.248,28.702) 79.309,28.763 C2.1 ; U1.13 C1.1 v1(80.01,106.553) ; U2.13 v1(81.28,34.163) ; U1.8 v1(85.09,98.425) ; D16.2 v1(98.044,48.006) ; D15.2 v1(98.044,50.546) ; D14.2 v1(98.044,53.086) ; D13.2 v1(98.044,55.626) ; D12.2 v1(98.044,58.166) ; D11.2 v1(98.044,60.706) ; D10.2 v1(98.044,63.246) ; D9.2 v1(98.044,65.786) ; D8.2 v1(98.044,68.326) ; D7.2 v1(98.044,70.866) ; D6.2 v1(98.044,73.406) ; D5.2 v1(98.044,75.946) ; D4.2 v1(98.044,78.486) ; D3.2 v1(98.044,81.026) ; D2.2 v1(98.044,83.566) ; D1.2 v1(98.044,86.106) ; C6.1 C6.1@95.819,94.513 ; C5.1@95.885,105.564 C5.1 ; U5.4@96.955,102.626 U5.4@97.809,102.626 ; v1(100.053,47.955) 107.559,47.955 D32.2 ; v1(100.053,63.246) D26.2 ; v1(100.076,50.546) D31.2 ; v1(100.076,53.086) D30.2 ; v1(100.076,55.626) D29.2 ; v1(100.076,58.166) D28.2 ; v1(100.076,60.706) D27.2 ; v1(100.076,65.786) D25.2 ; v1(100.076,68.326) D24.2 ; v1(100.076,70.866) D23.2 ; v1(100.076,73.406) D22.2 ; v1(100.076,75.946) D21.2 ; v1(100.076,78.486) D20.2 ; v1(100.076,81.026) D19.2 ; v1(100.076,83.566) D18.2 ; v1(100.076,86.106) D17.2 ; v1(113.697,36.449) 113.716,36.468 U4.8 ; U3.13 117.526,104.623 C4.1 v1(117.541,106.426) ; v1(117.983,28.321) 117.983,28.448 118.044,28.509 C3.1 C3.1@118.069,30.251 ; C3.1@118.019,30.251 C3.1@118.069,30.251 ; U4.13 118.796,31.642 118.286,31.132 118.286,30.468 C3.1@118.069,30.251 ; v1(122.555,98.552) 122.555,97.186 U3.8
  Top Layer w1: C6.1@95.819,94.513 95.819,95.824 97.021,97.026 97.021,97.826 99.271,100.076 U5.4@100.059,100.076 ; C5.1@95.885,105.564 95.935,105.514 96.035,105.514 97.809,103.74 97.809,102.626 97.809,102.326 U5.4@100.059,100.076 ; v2(100.076,100.076) U5.4 U5.4@100.059,100.076
  other v2: 101.473,98.933 101.473,101.346
NetC5_2: C5.2 J1.1 U5.1 | length 0.1
  Top Layer w0.5: J1.1 J1.1@94.021,109.804
NetD1_1: D1.1 R1.2 | length 29
  Top Layer w0.3: R1.2 75.792,103.886 75.175,103.269 75.175,92.664 81.733,86.106 82.55,86.106
  Top Layer w0.4: 82.55,86.106 D1.1
NetD2_1: D2.1 R2.2 | length 24.1
  Top Layer w0.3: v1(76.2,94.107) R2.2 ; v1(77.318,83.541) 77.343,83.566 82.057,83.566
  Top Layer w0.4: 82.057,83.566 D2.1
  Bottom Layer w0.3: v1(76.2,94.107) 76.2,92.654 77.318,91.537 v1(77.318,83.541)
NetD3_1: D3.1 R3.2 | length 25.7
  Top Layer w0.3: v1(77.47,94.107) R3.2 ; v1(78.003,81.026) 82.057,81.026
  Top Layer w0.4: 82.057,81.026 D3.1
  Bottom Layer w0.3: v1(77.47,94.107) 77.47,92.528 78.003,91.995 v1(78.003,81.026)
NetD4_1: D4.1 R4.2 | length 27.4
  Top Layer w0.3: v1(78.613,78.486) 82.057,78.486 ; v1(78.74,94.107) R4.2
  Top Layer w0.4: 82.057,78.486 D4.1
  Bottom Layer w0.3: v1(78.613,78.486) 78.74,78.613 v1(78.74,94.107)
NetD5_1: D5.1 R5.2 | length 29.4
  Top Layer w0.3: v1(79.375,75.946) 82.057,75.946 82.184,75.946 ; v1(80.01,94.107) R5.2
  Top Layer w0.4: 82.184,75.946 D5.1
  Bottom Layer w0.3: v1(79.375,75.946) 79.375,92.456 80.01,93.091 v1(80.01,94.107)
NetD6_1: D6.1 R6.2 | length 31.6
  Top Layer w0.3: v1(80.01,73.406) 82.057,73.406 ; v1(81.28,94.107) R6.2
  Top Layer w0.4: 82.057,73.406 D6.1
  Bottom Layer w0.3: v1(80.01,73.406) 80.025,73.421 80.025,91.836 81.28,93.091 v1(81.28,94.107)
NetD7_1: D7.1 R7.2 | length 33.8
  Top Layer w0.3: v1(80.645,70.866) 82.057,70.866 ; v1(82.55,94.107) R7.2
  Top Layer w0.4: 82.057,70.866 D7.1
  Bottom Layer w0.3: v1(80.645,70.866) 80.66,70.881 80.66,91.104 82.55,92.994 v1(82.55,94.107)
NetD8_1: D8.1 R8.2 | length 35.9
  Top Layer w0.3: v1(81.28,68.326) 82.057,68.326 ; v1(83.82,94.107) R8.2
  Top Layer w0.4: 82.057,68.326 D8.1
  Bottom Layer w0.3: v1(81.28,68.326) 81.295,68.341 81.295,71.135 81.28,71.15 81.28,90.678 83.82,93.218 v1(83.82,94.107)
NetD9_1: D9.1 R9.2 | length 51.1
  Top Layer w0.3: v1(82.804,30.384) R9.2
  Top Layer w0.4: v1(76.962,64.389) 76.962,64.516 78.232,65.786 D9.1
  Bottom Layer w0.4: v1(76.962,64.389) 76.454,63.881 76.454,40.64 82.804,34.29 v1(82.804,30.384)
NetD10_1: D10.1 R10.2 | length 40.6
  Top Layer w0.3: 82.057,63.246 77.557,63.246 76.668,62.357 76.668,46.141 80.681,42.128 84.11,42.128 85.09,41.148 R10.2
  Top Layer w0.4: 82.057,63.246 D10.1
NetD11_1: D11.1 R11.2 | length 37.9
  Top Layer w0.3: 82.057,60.706 77.851,60.706 77.216,60.071 77.216,46.308 80.613,42.911 82.916,42.911 83.693,43.688 v1(83.805,43.688) ; v1(83.805,41.402) 83.805,40.504 R11.2
  Top Layer w0.4: 82.057,60.706 D11.1
  Bottom Layer w0.3: v1(83.805,41.402) v1(83.805,43.688)
NetD12_1: D12.1 R12.2 | length 32.2
  Top Layer w0.3: 82.057,58.166 78.359,58.166 77.724,57.531 77.724,46.507 80.67,43.561 v1(82.55,43.561) ; R12.2 v1(82.55,41.402)
  Top Layer w0.4: 82.057,58.166 D12.1
  Bottom Layer w0.3: v1(82.55,41.402) v1(82.55,43.561)
NetD13_1: D13.1 R13.2 | length 28.1
  Top Layer w0.3: R13.2 v1(81.28,41.402) ; v1(81.357,44.45) 80.488,44.45 78.232,46.706 78.232,55.245 78.613,55.626 82.057,55.626
  Top Layer w0.4: 82.057,55.626 D13.1
  Bottom Layer w0.3: v1(81.28,41.402) 81.28,41.483 81.357,41.56 v1(81.357,44.45)
NetD14_1: D14.1 R14.2 | length 23.6
  Top Layer w0.3: R14.2 v1(80.01,41.402) ; v1(80.01,45.847) 78.74,47.117 78.74,52.578 79.248,53.086 82.057,53.086
  Top Layer w0.4: 82.057,53.086 D14.1
  Bottom Layer w0.3: v1(80.01,41.402) v1(80.01,45.847)
NetD15_1: D15.1 R15.2 | length 19.2
  Top Layer w0.3: R15.2 v1(78.74,41.402) ; v1(80.391,48.768) 80.391,49.403 81.534,50.546 83.058,50.546
  Top Layer w0.4: 83.058,50.546 D15.1
  Bottom Layer w0.3: v1(78.74,41.402) 78.74,45.593 80.391,47.244 v1(80.391,48.768)
NetD16_1: D16.1 R16.2 | length 18.4
  Top Layer w0.3: R16.2 v1(77.47,41.402) ; v1(79.502,47.955) 82.006,47.955 82.057,48.006
  Top Layer w0.4: 82.057,48.006 D16.1
  Bottom Layer w0.3: v1(77.47,41.402) 77.47,45.923 v1(79.502,47.955)
NetD17_1: D17.1 R17.2 | length 29
  Top Layer w0.3: D17.1@108.687,86.106 115.951,86.106 116.459,86.614 116.459,89.662 112.141,93.98 112.141,103.073 113.716,104.648 R17.2
NetD18_1: D18.1 R18.2 | length 20.7
  Top Layer w0.3: D18.1@108.687,83.566 116.197,83.566 117.094,84.463 117.094,90.17 113.697,93.567 R18.2
NetD19_1: D19.1 R19.2 | length 23.8
  Top Layer w0.3: D19.1@108.687,81.026 108.814,80.899 116.967,80.899 117.729,81.661 117.729,90.729 114.986,93.472 R19.2
NetD20_1: D20.1 R20.2 | length 26.2
  Top Layer w0.3: D20.1@108.687,78.486 116.967,78.486 118.296,79.815 118.296,91.186 116.237,93.245 R20.2
NetD21_1: D21.1 R21.2 | length 28.5
  Top Layer w0.3: D21.1@108.687,75.946 116.864,75.946 118.796,77.878 118.796,92.075 117.526,93.345 R21.2
NetD22_1: D22.1 R22.2 | length 31.2
  Top Layer w0.3: D22.1@108.687,73.406 117.221,73.406 119.38,75.565 119.38,92.742 118.777,93.345 R22.2
NetD23_1: D23.1 R23.2 | length 34.2
  Top Layer w0.3: D23.1@108.687,70.866 117.983,70.866 119.888,72.771 119.888,93.218 120.066,93.396 R23.2
NetD24_1: D24.1 R24.2 | length 37.3
  Top Layer w0.3: D24.1@108.687,68.326 117.856,68.326 120.396,70.866 120.396,92.456 121.368,93.428 R24.2
NetD25_1: D25.1 R25.2 | length 48.2
  Top Layer w0.3: D25.1 117.729,65.786 120.269,63.246 120.269,45.339 124.46,41.148 124.46,33.051 122.116,30.707 122.016,30.707 R25.2
NetD26_1: D26.1 R26.2 | length 34.3
  Top Layer w0.3: D26.1 117.856,63.246 119.761,61.341 119.761,44.759 122.615,41.905 R26.2
NetD27_1: D27.1 R27.2 | length 30.9
  Top Layer w0.3: D27.1 117.094,60.706 119.253,58.547 119.253,44.196 121.336,42.113 121.336,40.197 R27.2 R27.2@121.445,40.197
NetD28_1: D28.1 R28.2 | length 27.5
  Top Layer w0.3: D28.1 116.737,58.166 118.669,56.234 118.669,43.307 120.066,41.91 120.066,40.197 R28.2
NetD29_1: D29.1 R29.2 | length 24.6
  Top Layer w0.3: D29.1 116.84,55.626 118.169,54.297 118.169,42.613 118.872,41.91 118.872,40.197 R29.2
NetD30_1: D30.1 R30.2 | length 21.7
  Top Layer w0.3: D30.1 108.687,53.213 116.84,53.213 117.602,52.451 117.602,40.197 R30.2
NetD31_1: D31.1 R31.2 | length 18.6
  Top Layer w0.3: D31.1 116.07,50.546 116.967,49.649 116.967,42.545 116.332,41.91 116.332,40.197 R31.2
NetD32_1: D32.1 R32.2 | length 15.8
  Top Layer w0.3: D32.1 115.824,48.006 116.332,47.498 116.332,43.256 114.995,41.919 R32.2
NetD33_1: D33.1 R33.2 | length 1.9
  Top Layer w0.3: D33.1@73.658,119.091 D33.1 73.716,118.849 73.716,118.531 74.391,117.856 R33.2
NetJ1_2: J1.2 P1.1
NetJ3_11: J3.11 R33.1 | length 55.9
  Top Layer w0.3: R33.1@73.675,117.347 73.675,63.231 J3.11
NetR1_1: R1.1 U1.15 | length 2.1
  Top Layer w0.3: R1.1 76.93,103.811 77.291,103.811 77.47,103.632 U1.15
NetR2_1: R2.1 U1.1 | length 1.6
  Top Layer w0.3: R2.1 U1.1
NetR3_1: R3.1 U1.2 | length 1.6
  Top Layer w0.3: R3.1 U1.2
NetR4_1: R4.1 U1.3 | length 1.6
  Top Layer w0.3: R4.1 U1.3
NetR5_1: R5.1 U1.4 | length 1.6
  Top Layer w0.3: R5.1 U1.4
NetR6_1: R6.1 U1.5 | length 1.6
  Top Layer w0.3: R6.1 U1.5
NetR7_1: R7.1 U1.6 | length 1.6
  Top Layer w0.3: R7.1 U1.6
NetR8_1: R8.1 U1.7 | length 1.6
  Top Layer w0.3: R8.1 U1.7
NetR9_1: R9.1 U2.15 | length 1.8
  Top Layer w0.3: R9.1 U2.15
NetR10_1: R10.1 U2.1 | length 1.8
  Top Layer w0.3: U2.1 R10.1
NetR11_1: R11.1 U2.2 | length 1.9
  Top Layer w0.3: U2.2 R11.1
NetR12_1: R12.1 U2.3 | length 1.9
  Top Layer w0.3: U2.3 R12.1
NetR13_1: R13.1 U2.4 | length 1.9
  Top Layer w0.3: U2.4 R13.1
NetR14_1: R14.1 U2.5 | length 1.9
  Top Layer w0.3: U2.5 R14.1
NetR15_1: R15.1 U2.6 | length 1.9
  Top Layer w0.3: U2.6 R15.1
NetR16_1: R16.1 U2.7 | length 1.9
  Top Layer w0.3: U2.7 R16.1
NetR17_1: R17.1 U3.15 | length 2.5
  Top Layer w0.3: U3.15@114.928,102.177 U3.15 R17.1
NetR18_1: R18.1 U3.1 | length 1.5
  Top Layer w0.3: R18.1 113.697,97.116 U3.1
NetR19_1: R19.1 U3.2 | length 2.8
  Top Layer w0.3: R19.1@114.967,95.655 U3.2@114.967,96.96 ; U3.2@114.967,97.155 U3.2@114.967,97.116 ; R19.1 114.986,96.942 U3.2@114.967,96.96 ; U3.2 U3.2@114.967,97.116 ; U3.2@114.967,96.96 U3.2@114.967,97.116
NetR20_1: R20.1 U3.3 | length 1.5
  Top Layer w0.3: R20.1 U3.3@116.237,97.116 ; U3.3@116.237,97.155 U3.3@116.237,97.116 ; U3.3 U3.3@116.237,97.116
NetR21_1: R21.1 U3.4 | length 1.5
  Top Layer w0.3: R21.1@117.507,95.655 U3.4@117.507,97.155
NetR22_1: R22.1 U3.5 | length 1.5
  Top Layer w0.3: R22.1 U3.5@118.777,97.155
NetR23_1: R23.1 U3.6 | length 1.5
  Top Layer w0.3: R23.1@120.047,95.655 U3.6@120.047,97.155
NetR24_1: R24.1 U3.7 | length 1.5
  Top Layer w0.3: R24.1@121.317,95.655 U3.7@121.317,97.155
NetR25_1: R25.1 U4.15 | length 2.2
  Top Layer w0.3: R25.1 121.316,30.707 121.336,30.727 U4.15
NetR26_1: R26.1 U4.1 | length 1.6
  Top Layer w0.3: U4.1 122.606,39.497 R26.1
NetR27_1: R27.1 U4.2 | length 1.6
  Top Layer w0.3: U4.2 121.336,39.497 R27.1
NetR28_1: R28.1 U4.3 | length 1.6
  Top Layer w0.3: U4.3 120.066,39.497 R28.1
NetR29_1: R29.1 U4.4 | length 1.6
  Top Layer w0.3: U4.4 118.796,39.497 R29.1
NetR30_1: R30.1 U4.5 | length 1.6
  Top Layer w0.3: R30.1@117.516,39.497 R30.1@117.526,39.497 ; U4.5 R30.1@117.526,39.497 ; R30.1 R30.1@117.526,39.497
NetR31_1: R31.1 U4.6 | length 1.6
  Top Layer w0.3: R31.1@116.246,39.497 R31.1@116.256,39.497 ; U4.6 R31.1@116.256,39.497 ; R31.1 R31.1@116.256,39.497
NetR32_1: R32.1 U4.7 | length 1.6
  Top Layer w0.3: R32.1@114.976,39.497 R32.1@114.986,39.497 ; U4.7 R32.1@114.986,39.497 ; R32.1 R32.1@114.986,39.497
NetU1_9: U1.9 U2.14 | length 92.5
  Top Layer w0.3: U2.14 82.655,32.953 82.655,33.633 83.947,34.925 91.876,34.925 98.694,41.743 98.694,55.92 98.687,55.927 98.687,57.865 98.694,57.872 98.694,89.266 97.79,90.17 87.376,90.17 86.614,90.932 86.614,99.949 85.09,101.473 U1.9
NetU2_9: U2.9 U3.14 | length 115.5
  Top Layer w0.3: U2.9 76.2,28.448 77.216,27.432 85.09,27.432 99.314,41.656 99.314,89.401 100.083,90.17 110.363,90.17 111.252,91.059 111.252,103.048 113.944,105.74 115.595,105.74 116.256,105.08 U3.14 U3.14@116.181,102.31
NetU3_9: U3.9 U4.14 | length 82.8
  Top Layer w0.3: U4.14 120.066,30.175 120.777,29.464 122.79,29.464 125.095,31.769 125.095,41.529 120.904,45.72 120.904,91.313 123.698,94.107 123.698,100 122.555,101.143 122.555,102.184 U3.9
SHCP: J3.8 U1.11 U2.11 U3.11 U4.11 | length 176.3
  Top Layer w0.3: v1(73.025,70.993) 72.898,70.866 72.898,36.576 74.422,35.052 78.105,35.052 78.74,34.417 U2.11 v1(78.74,31.832) ; v1(82.169,89.916) 82.169,90.424 84.47,92.725 84.47,97.902 82.55,99.822 U1.11 v1(82.55,103.251) ; v1(112.268,31.75) 112.268,33.147 113.284,34.163 115.894,34.163 116.256,33.801 U4.11 ; v1(120.066,100.564) U3.11
  Bottom Layer w0.3: v1(73.025,70.993) 74.803,70.993 J3.8 74.933,71.123 76.07,71.123 77.089,70.104 77.089,68.199 78.105,67.183 81.534,67.183 82.169,67.818 v1(82.169,89.916) ; v1(78.74,31.832) 80.981,29.591 110.236,29.591 112.268,31.623 v1(112.268,31.75) ; v1(82.55,103.251) 82.631,103.251 82.781,103.101 82.827,103.101 83.566,102.362 107.315,102.362 109.728,99.949 119.451,99.949 v1(120.066,100.564)
STCP: J3.7 U1.12 U2.12 U3.12 U4.12 | length 178.2
  Top Layer w0.3: J3.7 76.03,74.76 ; v1(81.28,103.251) U1.12 81.28,101.346 80.625,100.691 78.74,100.691 78.105,101.326 78.105,104.521 77.216,105.41 75.184,105.41 74.675,104.901 74.675,92.203 76.668,90.21 76.668,75.398 76.03,74.76 ; v1(81.534,28.829) 81.534,30.397 80.01,31.921 U2.12 80.01,34.29 78.359,35.941 76.327,35.941 75.55,36.718 75.55,40.287 76.03,40.767 76.03,74.76 ; v1(111.506,29.718) 111.506,33.274 113.03,34.798 116.646,34.798 117.526,33.918 U4.12 ; v1(118.796,100.691) U3.12
  Bottom Layer w0.3: v1(81.28,103.251) 82.169,104.14 84.201,104.14 84.912,103.429 107.544,103.429 110.281,100.691 v1(118.796,100.691) ; v1(81.534,28.829) 110.617,28.829 v1(111.506,29.718)
pads on no net: J1. J1.3 J2. J2.1 J2.2 J2.3 J2.4 J2.5 J2.6 J2.7 J2.8 J2.9 J2.10 J2.11 J2.12 J2.13 J2.14 J2.15 J2.16 J2.17 J2.18 J2.19 J2.20 J2.21 J2.22 J2.23 J2.24 J2.25 J2.26 J2.27 J2.28 J2.29 J2.30 J2.31 J2.32 J3. J3.1 J3.2 J3.3 J3.4 J3.5 J3.9 J3.10 J3.12 J3.13 J3.14 J3.16 J3.17 J3.18 J3.19 J3.20 J3.21 J3.22 J3.23 J3.26 J3.27 J3.28 J3.29 U4.9

## Polygon pours and split planes (outlines as drawn)
NetC5_2 on Top Layer "Top Layer-NetC5_2" (solid, pour order 6): 92.608,101.803 92.608,104.089 93.447,104.927 93.447,108.407 94.539,108.407 94.539,104.927 95.402,104.064 95.402,101.803
NetJ1_2 on Top Layer "Top Layer-NetJ1_2" (solid, pour order 0): 84.709,112.395 83.134,112.395 83.134,110.82 79.426,110.82 79.426,113.208 79.756,113.538 97.384,113.538 99.466,111.455 99.466,109.855 97.536,109.855 97.536,111.658 96.799,112.395
GND on Int1 (GND) (split plane): 126.49,121.41 126.49,25.91 71.63,25.91 71.63,121.41
+5 on Int2 (PWR) (split plane): 126.49,121.41 126.49,25.91 71.63,25.91 71.63,121.41

## Silkscreen, mask and mechanical layers (free items; w line width, h text height)
Bottom Overlay:
  text "RetroBreadboard v1i2  / @ MAKinteract Lab KAIST 2019" at 125.07,114.783 h1
BoardOutline:
  lines w0.2: 71.12,25.4 127.02,25.4 127.02,121.9 71.12,121.9 71.12,25.4